# Altium PCB MCH_CLKB_PCB.PcbDoc (part 5 of 5)
Units mil, origin at the board's own origin, x right, y up, seen from the top; angles counter-clockwise.
Board outline 7110.67 x 2894.12 mil, 6 copper layers (Top Layer, GND, MidLayer1, MidLayer2, InternalPlane1, Bottom Layer), stack 61.549 mil thick; 421 components, 433 nets, 2112 pads, 1311 vias.
Unrouted connection lines stored in the file: 39.
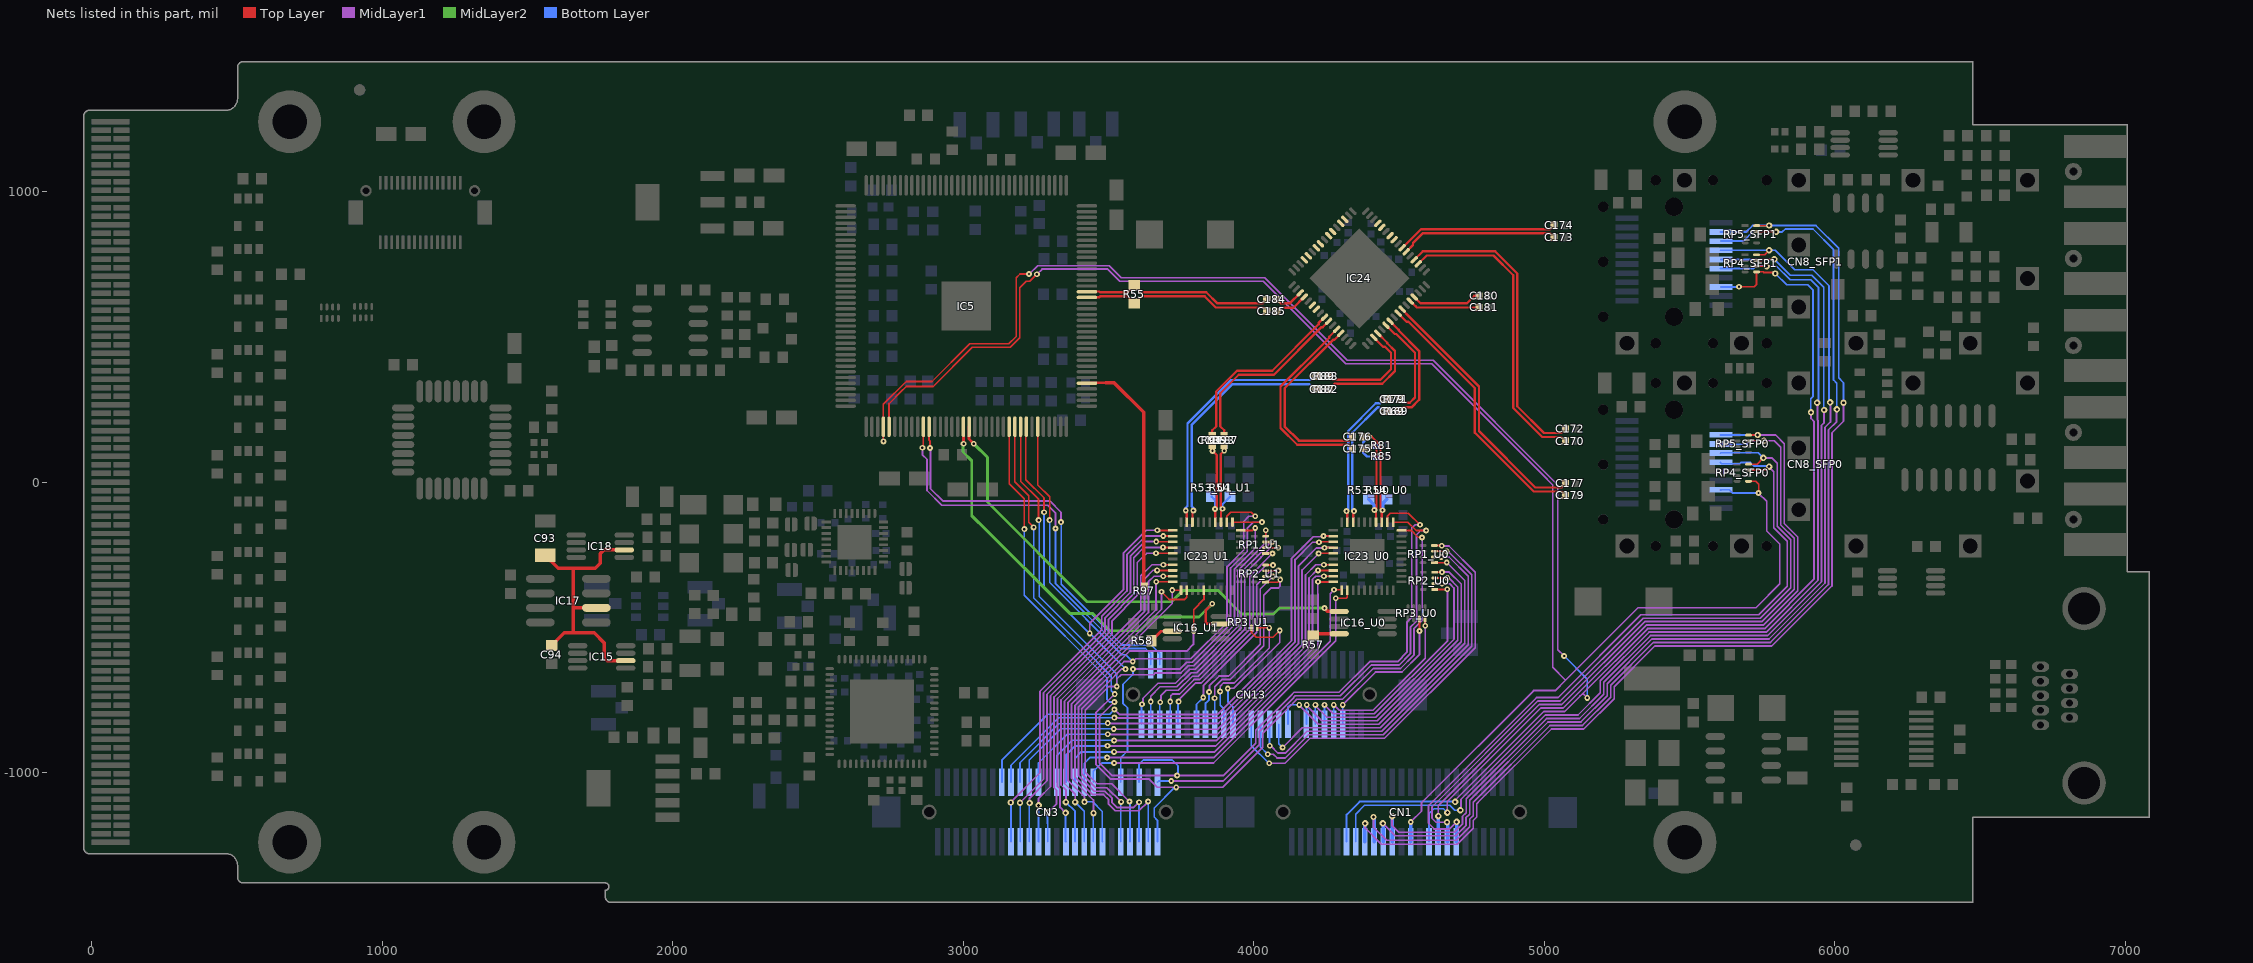
[diagram p9: the nets of this part, all layers, seen from the top]

## Via types
v1: diameter 20, hole 8, Top Layer to Bottom Layer, tented both sides, 842 vias
v2: diameter 22, hole 10, Top Layer to Bottom Layer, tented both sides, 199 vias
v3: diameter 24, hole 12, Top Layer to Bottom Layer, tented both sides, 163 vias
v4: diameter 25.98, hole 12.99, Top Layer to Bottom Layer, tented both sides, 58 vias
v5: diameter 20, hole 10, Top Layer to Bottom Layer, tented both sides, 18 vias
v6: diameter 20, hole 10, Top Layer to Bottom Layer, 16 vias
v7: diameter 28, hole 10, Top Layer to Bottom Layer, tented both sides, 15 vias

## Nets (pads, with @x,y where several pads share a name; then routed paths per layer and width w, separated by ;. In a path a pad name is that pad's centre, name@x,y a point inside that pad or via, vN(x,y) a via of type N, cw(c..) or ccw(c..) an arc to the next point about the centre after c; other vN are vias at no path point) (continued)
UP0_LOS: CN1.28 CN8_SFP0.8 IC5.77 RP4_SFP0.5 | length 5999.2
  Top Layer w6: 2744.5,251 2744.5,256 ; IC5.77@2744.75,190.65 2744.5,190.9 2744.5,256 ; IC5.77@2744.75,191.65 2744.75,236.75 ; 2780.5,306 2785,310.5 ; v1(3253.5,715) 3229.5,691 3216.5,691 3194.5,669 3194.5,496.19 3162.31,464 3031.5,464 2896.5,329 2803.5,329 2785,310.5 ; RP4_SFP0.5@5703.19,2.47 5728.03,2.47 5738.5,-8 5738.5,-37 v1(5737.5,-38) ; 2744.5,256 2744.5,270 2785,310.5
  MidLayer1 w6: v1(3253.5,715) 3271.5,733 3497.53,733 3539.53,691 4033.5,691 4317.5,407 4612.5,407 4991.5,28 ; v1(4540.5,-1170) 4577.58,-1132.92 4577.58,-1103.78 4963.42,-717.94 5037.56,-717.94 5073.5,-682 ; 4982.5,37 4991.5,28 ; v1(5737.5,-38) 5766.26,-66.76 5766.26,-168.73 5811,-213.47 5811,-350.5 5729,-432.5 5323,-432.5 5073.5,-682 ; 4991.5,28 5029.5,-10 5029.5,-638 5073.5,-682
  Bottom Layer w6: CN8_SFP0.8@5606.92,-27.22 CN8_SFP0.8@5608.48,-27.22 ; CN8_SFP0.8@5638.93,-26.32 CN8_SFP0.8@5608.48,-26.32 5636.82,-26.32 5648.5,-38 v1(5737.5,-38)
  Bottom Layer w12: CN1.28@4540.22,-1238.58 4540.22,-1170.28 v1(4540.5,-1170)
UP0_PRBSEN: CN3.49 IC23_U0.31 | length 1663.1
  Top Layer w6: IC23_U0.31@4479.94,-138.02 4530.49,-138.02 4559.47,-167 v1(4593.5,-167)
  MidLayer1 w6: v1(3716.5,-1029) 3895.31,-1029 4019.5,-904.81 4019.5,-860.03 4132.4,-747.13 4132.53,-747.13 4143.66,-736 4298.5,-736 4404.5,-630 4500.47,-630 4539.5,-590.97 4539.5,-500.16 4560.5,-479.16 4560.5,-182 4575.5,-167 v1(4593.5,-167)
  Bottom Layer w6: CN3.49@3668.56,-1033.86 3673.42,-1029 v1(3716.5,-1029)
UP0_RBCLK_FPGA: IC5.91 IC16_U0.5 | length 1700.2
  Top Layer w10: IC5.91@3020.34,190.65 3020.34,148.16 v1(3036.5,132)
  Top Layer w12: v1(4243.5,-434) 4255.11,-445.61 IC16_U0.5@4293.82,-445.61
  MidLayer2 w10: v1(3036.5,132) 3083.5,85 3083.5,-69 3426.5,-412 3717.5,-412 3755.5,-374 3878.5,-374 3958.5,-454 4068.5,-454 4088.5,-434 v1(4243.5,-434)
UP0_RBCLK_MAIN: IC16_U0.8 R57.2 | length 91.9
  Top Layer w12: R57.2@4204.5,-528.5 4210.62,-522.39 IC16_U0.8@4293.82,-522.39
UP0_RD0: CN13.26 RP1_U0.4 | length 1490
  Top Layer w6: RP1_U0.4@4622.19,-218.47 v1@4646.97,-218.47
  MidLayer1 w6: v1(4053.5,-968) 4102.5,-968 ; 4082.5,-968 4102.5,-968 ; v1@4648.5,-220 4672.37,-220 4762.5,-310.13 4762.5,-569.92 4450.42,-882 4193.63,-882 4107.63,-968 4102.5,-968
  Bottom Layer w6: CN13.26@3991.79,-833.86 3991.79,-907.16 4052.63,-968 v1(4053.5,-968)
  other v1: 4647.5,-219
UP0_RD1: CN13.28 RP1_U0.3 | length 1388.2
  Top Layer w6: RP1_U0.3@4622.19,-238.16 4663.66,-238.16 v1(4664.5,-239)
  MidLayer1 w6: v1(4048.5,-937) 4067.5,-937 4080.5,-950 4108.66,-950 4188.66,-870 4445.45,-870 4750.5,-564.95 4750.5,-319.16 4670.34,-239 v1(4664.5,-239)
  Bottom Layer w6: CN13.28@4023.29,-833.86 4023.29,-912 4048.29,-937 v1(4048.5,-937)
UP0_RD2: CN13.30 RP1_U0.2 | length 1305.9
  Top Layer w6: RP1_U0.2@4622.19,-257.84 4645.34,-257.84 v1(4645.5,-258)
  MidLayer1 w6: v1(4055.5,-908) v1@4058.5,-908 ; v1@4061.5,-908 v1@4058.5,-908 ; v1(4645.5,-258) 4672.37,-258 4738.5,-324.13 4738.5,-559.98 4440.48,-858 4183.69,-858 4108.69,-933 4083.5,-933 v1@4058.5,-908
  Bottom Layer w6: v1@4054.78,-909.28 CN13.30@4054.78,-833.86
UP0_RD3: CN13.32 RP1_U0.1 | length 1207.5
  Top Layer w6: RP1_U0.1@4622.19,-277.53 4663.97,-277.53 v1(4664.5,-277)
  MidLayer1 w6: v1(4099.5,-914) 4167.5,-846 4224.5,-846 4435.51,-846 4726.5,-555.01 4726.5,-339 v1(4664.5,-277)
  Bottom Layer w6: CN13.32@4086.28,-833.86 4086.28,-900.78 v1(4099.5,-914)
UP0_RD4: CN13.34 RP2_U0.4 | length 1111.8
  Top Layer w6: RP2_U0.4@4623.19,-310.47 4648.03,-310.47 v1(4648.5,-310)
  MidLayer1 w6: v1(4156.5,-767) 4156.5,-767.87 4222.63,-834 4430.54,-834 4714.5,-550.04 4714.5,-351.13 4673.37,-310 v1(4648.5,-310)
  Bottom Layer w6: CN13.34@4117.78,-833.86 4117.78,-775.72 4126.5,-767 v1(4156.5,-767)
UP0_RD5: CN13.38 RP2_U0.3 | length 1064.9
  Top Layer w6: RP2_U0.3@4623.19,-330.16 4664.66,-330.16 4665.5,-331 v1(4666.5,-330)
  MidLayer1 w6: v1@4181.5,-769 4234.5,-822 4425.57,-822 4702.5,-545.07 4702.5,-361.16 4671.34,-330 v1(4666.5,-330)
  Bottom Layer w6: v1@4180.77,-769.73 CN13.38@4180.77,-833.86 4181.5,-833.13 v1@4181.5,-769 ; v1@4180.77,-760.73 v1@4181.5,-760
  other v1: 4182.5,-767
UP0_RD6: CN13.40 RP2_U0.2 | length 917.3
  Top Layer w6: RP2_U0.2@4623.19,-349.84 4648.34,-349.84 v1(4648.5,-350)
  MidLayer1 w6: v1@4212.26,-770.24 4251.03,-809 4252.03,-810 4269.53,-810 4420.6,-810 4689.5,-541.1 4689.5,-365.13 4674.37,-350 v1(4648.5,-350)
  Bottom Layer w6: CN13.40@4212.26,-833.86 v1@4212.26,-770.24
  other v1: 4212.26,-767
UP0_RD7: CN13.42 RP2_U0.1 | length 838.6
  Top Layer w6: RP2_U0.1@4623.19,-369.53 4665.97,-369.53 v1(4666.5,-369)
  MidLayer1 w6: v1(4243.5,-767) 4274.5,-798 4311.5,-798 4415.63,-798 4667.5,-546.13 4667.5,-374 4672.5,-369 v1(4666.5,-369)
  Bottom Layer w6: v1@4242.5,-760 v1@4243.76,-761.26 ; v1@4243.5,-760 v1@4243.76,-760.26 ; CN13.42@4243.76,-833.86 v1@4243.76,-771.26 ; v1@4243.76,-764 v1@4243.76,-760
UP0_RD8: CN13.44 RP3_U0.4 | length 599.1
  Top Layer w6: RP3_U0.4@4590.03,-471.68 4590.03,-494.53 v1(4590.5,-495)
  MidLayer1 w6: v1(4275.26,-767) 4294.26,-786 4304.5,-786 4410.66,-786 4590.5,-606.16 4590.5,-515 v1(4590.5,-495)
  Bottom Layer w6: CN13.44@4275.26,-833.86 v1@4275.26,-769 ; v1@4275.26,-761 4275.26,-760 v1@4275.26,-761
UP0_RD9: CN13.46 RP3_U0.3 | length 517.6
  Top Layer w6: RP3_U0.3@4570.34,-471.68 4570.34,-512.84 v1(4570.5,-513)
  MidLayer1 w6: v1(4306.5,-767) 4419.5,-654 4510.41,-654 4570.5,-593.91 v1(4570.5,-513)
  Bottom Layer w6: CN13.46@4306.75,-833.86 v1@4306.75,-774.25
UP0_RX_N: C176.1 IC23_U0.33 R54_U0.2 R85.1 | length 503.9
  Top Layer w8: C176.1@4376.22,156 v1(4396.5,156) 4406.5,156 4436.5,126 4436.5,97 ; 4436.5,102 4436.5,97 ; IC23_U0.33@4440.57,-138.02 4440.57,-99.93 v1(4443.5,-97) 4436.5,-90 4436.5,97
  Bottom Layer w8: v1(4396.5,156) 4376.5,136 4376.5,102 4390.5,88 R85.1@4422.78,88
  Bottom Layer w12: v1(4443.5,-97) 4443.5,-74.5 R54_U0.2@4458.5,-59.5
UP0_RX_P: C175.1 IC23_U0.34 R53_U0.2 R81.1 | length 374.3
  Top Layer w8: v1(4396.5,115) 4410.5,129 4413.5,129 4422.5,120 4422.5,-89 v1(4415.5,-96) 4420.89,-101.39 IC23_U0.34@4420.89,-138.02
  Bottom Layer w8: v1(4396.5,115) 4407.5,126 R81.1@4422.78,126
  Bottom Layer w12: R53_U0.2@4395.5,-59.5 4415.5,-79.5 v1(4415.5,-96)
UP0_SCL: CN1.38 CN8_SFP0.5 RP4_SFP0.7 | length 2480.3
  Top Layer w6: RP4_SFP0.7@5703.19,41.84 5763.34,41.84 v2(5774.5,53)
  MidLayer1 w6: v2(4698.5,-1170) 4674.5,-1194 4620.86,-1194 4601.58,-1174.72 4601.58,-1113.72 4973.36,-741.94 5047.5,-741.94 5332.94,-456.5 5738.94,-456.5 5836.5,-358.94 5836.5,-204 5790.26,-157.76 5790.26,35.24 v2@5774.5,51 ; v2(5774.5,53) v2@5775.5,52
  Bottom Layer w6: CN8_SFP0.5@5606.92,67.27 5611.63,62.55 5671.72,62.55 5676.44,67.27 5710.23,67.27 5722.5,55 v2@5772.5,55
  Bottom Layer w12: CN1.38@4697.7,-1238.58 4699.5,-1236.78 v2@4699.5,-1170
UP0_SDA: CN1.36 CN8_SFP0.4 RP4_SFP0.8 | length 2431.1
  Top Layer w6: RP4_SFP0.8@5703.19,61.53 5733.03,61.53 v2(5754.5,83)
  MidLayer1 w6: v2(4665.5,-1171) 4627.67,-1171 4613.58,-1156.92 4613.58,-1118.69 4978.33,-753.94 5055.56,-753.94 5341,-468.5 5743.91,-468.5 5848.5,-363.91 5848.5,-199 5802.26,-152.76 5802.26,64.24 5783.5,83 v2(5754.5,83)
  Bottom Layer w6: CN8_SFP0.4@5606.92,98.76 5608.7,100.55 5736.95,100.55 v2(5754.5,83)
  Bottom Layer w12: v2(4665.5,-1171) 4667.5,-1173 4667.5,-1237.28 CN1.36@4666.2,-1238.58
UP0_SYNC: CN3.50 IC5.99 IC23_U0.30 | length 3400.5
  Top Layer w6: IC5.99@3177.82,191.65 3177.5,191.32 3177.5,1 3225.5,-47 3225.5,-139 v1(3242.5,-156) ; IC23_U0.30@4508.48,-166.56 4542.06,-166.56 4565.5,-190 v1@4579.5,-190
  MidLayer1 w6: v1@3520.63,-730 3457.5,-793.13 3457.5,-973 3506.5,-1022 3638.5,-1022 3667.5,-1051 v1(3733.5,-1051) 3893.5,-1051 4031.5,-913 4031.5,-865 4137.37,-759.13 ; 4137.5,-759.13 4148.63,-748 4305.5,-748 4411.5,-642 4505.44,-642 4551.5,-595.94 4551.5,-505.13 4580.5,-476.13 v1@4580.5,-191
  Bottom Layer w6: v1(3242.5,-156) 3242.5,-371 3242.5,-399 3409.5,-566 3409.5,-568 3509.5,-668 3509.5,-718 v1(3521.5,-730) ; CN3.50@3668.56,-1238.58 3668.56,-1164.06 3657.5,-1153 3657.5,-1122 3728.5,-1051 v1(3733.5,-1051)
  other v1: 4579.5,-191
UP0_SYNCEN: CN3.45 IC5.98 IC23_U0.32 | length 3494.1
  Top Layer w6: IC5.98@3158.14,191.65 IC5.98@3158.5,191.28 ; IC5.98@3158.5,190.65 3158.5,-6 3210.5,-58 v1(3210.5,-162) ; IC23_U0.32@4460.26,-138.02 4460.26,-117.24 4470.5,-107 4532.5,-107 v1(4572.5,-147)
  MidLayer1 w6: v1(3520.5,-757) 3519.63,-757 3469.5,-807.13 3469.5,-968.03 3511.47,-1010 3670.5,-1010 ; 3661.5,-1010 3670.5,-1010 ; v1(4572.5,-147) 4555.5,-147 4544.5,-158 4544.5,-466 4527.5,-483 4527.5,-586 4495.5,-618 4399.53,-618 4293.53,-724 4138.69,-724 4127.56,-735.13 4127.43,-735.13 4007.5,-855.06 4007.5,-899.84 3897.34,-1010 v1(3736.5,-1010) 3670.5,-1010
  Bottom Layer w6: v1(3210.5,-162) 3210.5,-390.23 3494.89,-674.62 3494.89,-682 3494.89,-749.39 3502.5,-757 v1(3520.5,-757) ; CN3.45@3605.57,-1033.86 3605.57,-970.93 3619.5,-957 3719.5,-957 3739.5,-977 3739.5,-1007 v1(3736.5,-1010)
UP0_TD0: CN3.15 IC23_U0.2 | length 1744.1
  Top Layer w6: v1(4240.5,-186) 4273.99,-186 IC23_U0.2@4274.23,-186.24
  MidLayer1 w6: v1(3520.5,-783) 3537.5,-800 3564.5,-800 ; 3544,-800 3564.5,-800 ; v1(4240.5,-186) 4238.5,-188 4204.53,-188 4130.5,-262.03 4130.5,-545.38 3875.88,-800 3564.5,-800
  Bottom Layer w6: CN3.15@3133.13,-1033.86 3133.13,-957.37 3277,-813.5 ; 3281.5,-809 3277,-813.5 ; v1(3520.5,-783) 3504.5,-799 3460.5,-799 3291.5,-799 3277,-813.5
UP0_TD1: CN3.17 IC23_U0.3 | length 1658.9
  Top Layer w6: v1(4224.5,-207) 4225.57,-205.93 IC23_U0.3@4274.23,-205.93
  MidLayer1 w6: v1(3520.5,-811) 3521.5,-812 3880.85,-812 4142.5,-550.35 4142.5,-267 4202.5,-207 v1(4224.5,-207)
  Bottom Layer w6: CN3.17@3164.63,-1033.86 3164.63,-974.87 3305,-834.5 ; 3308.5,-831 3305,-834.5 ; v1(3520.5,-811) 3328.5,-811 3305,-834.5
UP0_TD2: CN3.19 IC23_U0.4 | length 1628.2
  Top Layer w6: v1(4243.5,-226) 4243.89,-225.61 IC23_U0.4@4274.23,-225.61
  MidLayer1 w6: v1(3497.5,-830) 3498.5,-831 3559.5,-831 ; 3539.31,-831 3559.5,-831 ; v1(4243.5,-226) 4242.5,-227 4215.63,-227 4154.5,-288.13 4154.5,-555.32 3878.82,-831 3559.5,-831
  Bottom Layer w6: CN3.19@3196.12,-1033.86 3195.5,-1033.24 3195.5,-966 3329.5,-832 v1@3495.5,-832
UP0_TD3: CN3.21 IC23_U0.5 | length 1596.5
  Top Layer w6: v1(4223.5,-246) 4224.2,-245.3 IC23_U0.5@4274.23,-245.3
  MidLayer1 w6: v1(3518.5,-850) 3519.5,-851 3561.5,-851 ; 3534.34,-851 3561.5,-851 ; v1(4223.5,-246) 4166.5,-303 4166.5,-560.3 3875.8,-851 3561.5,-851
  Bottom Layer w6: CN3.21@3227.62,-1033.86 3227.62,-956.88 3335.5,-849 v1@3517.5,-849
UP0_TD4: CN3.23 IC23_U0.7 | length 1508.3
  Top Layer w6: v1@4241.83,-284.67 IC23_U0.7@4274.23,-284.67
  MidLayer1 w6: v1(3497.5,-868) 3498.5,-869 3874.77,-869 4178.5,-565.27 4178.5,-320.13 4213.63,-285 v1(4241.5,-285)
  Bottom Layer w6: CN3.23@3259.11,-1033.86 3259.11,-995.54 3259.11,-967.39 3358.5,-868 v1(3497.5,-868)
UP0_TD5: CN3.27 IC23_U0.8 | length 1476.9
  Top Layer w6: v1(4221.5,-304) 4221.85,-304.35 IC23_U0.8@4274.23,-304.35
  MidLayer1 w6: v1@3518.5,-890 v1(3519.5,-890) 3870.74,-890 4097.61,-663.13 4097.74,-663.13 4190.5,-570.37 4190.5,-330.16 4216.66,-304 v1(4221.5,-304)
  Bottom Layer w6: CN3.27@3322.11,-1033.86 3322.11,-974 ; 3322.11,-947.85 3322.11,-974 ; v1(3519.5,-890) 3518.5,-889 3375.5,-889 3322.11,-942.39 3322.11,-974
UP0_TD6: CN3.29 IC23_U0.9 | length 1425.6
  Top Layer w6: v1(4241.5,-324) v1(4241.5,-324) IC23_U0.9@4274.23,-324.04
  MidLayer1 w6: v1(3496.5,-908) 3497.5,-909 3868.71,-909 4102.58,-675.13 4102.71,-675.13 4202.5,-575.34 4202.5,-335.13 4213.63,-324 v1(4241.5,-324)
  Bottom Layer w6: CN3.29@3353.6,-1033.86 3353.6,-972 ; 3353.6,-966.68 3353.6,-972 ; 3425.5,-909 3416.5,-909 ; v1(3496.5,-908) 3495.5,-909 3416.5,-909 ; 3353.6,-972 3353.6,-939.9 3384.5,-909 3416.5,-909
UP0_TD7: CN3.31 IC23_U0.10 | length 1360.2
  Top Layer w6: v1(4221.5,-343) 4222.22,-343.72 IC23_U0.10@4274.23,-343.72
  MidLayer1 w6: v1(3519.5,-929) 3861.68,-929 3865.68,-929 4107.55,-687.13 4107.68,-687.13 4221.5,-573.31 4221.5,-384.87 4220.5,-383.87 4220.5,-344 v1(4221.5,-343)
  Bottom Layer w6: CN3.31@3385.1,-1033.86 3385.1,-950.4 3406.5,-929 3512.5,-929 v1(3519.5,-929)
UP0_TD8: CN3.33 IC23_U0.11 | length 1298.6
  Top Layer w6: v1(4276.5,-371) 4301.51,-371 IC23_U0.11@4302.78,-372.27
  MidLayer1 w6: v1@3492.5,-948 v1(3495.5,-948) 3863.65,-948 4112.52,-699.13 4112.65,-699.13 4263.5,-548.28 4263.5,-402 4263.5,-384 v1(4276.5,-371)
  Bottom Layer w6: CN3.33@3416.59,-1033.86 3416.59,-968.91 3437.5,-948 v1(3495.5,-948)
UP0_TD9: CN3.35 IC23_U0.12 | length 1270.5
  Top Layer w6: v1(4282.5,-400) 4318.5,-400 4322.46,-396.04 IC23_U0.12@4322.46,-372.27
  MidLayer1 w6: v1(3519.5,-967) 3861.62,-967 4117.49,-711.13 4117.62,-711.13 4282.5,-546.25 v1(4282.5,-400)
  Bottom Layer w6: CN3.35@3448.09,-1033.86 3448.09,-995.54 3466.02,-977.61 3476.63,-967 v1(3519.5,-967)
UP0_TX_DISABLE: CN1.34 CN8_SFP0.3 RP5_SFP0.7 | length 2441.6
  Top Layer w6: RP5_SFP0.7@5703.19,141.84 5756.34,141.84 v2(5756.5,142)
  MidLayer1 w6: v2(4635.5,-1150) 4635.5,-1113.75 4983.3,-765.94 5060.53,-765.94 5345.97,-480.5 5748.88,-480.5 5860.5,-368.88 5860.5,-193.97 5814.26,-147.73 5814.26,120.24 5792.5,142 v2(5756.5,142)
  Bottom Layer w6: CN8_SFP0.3@5606.92,130.26 5695.76,130.26 5707.5,142 v2(5756.5,142)
  Bottom Layer w12: CN1.34@4634.7,-1238.58 4635.5,-1237.79 v2(4635.5,-1150)
UP0_TX_FAULT: CN1.32 CN8_SFP0.2 RP5_SFP0.8 | length 2519
  Top Layer w6: RP5_SFP0.8@5703.19,161.53 5726.03,161.53 v2@5731.5,167
  MidLayer1 w6: v2(4666.5,-1138) 4666.5,-1099.72 4988.27,-777.94 5065.5,-777.94 5350.94,-492.5 5753.85,-492.5 5872.5,-373.85 5872.5,-189 5826.26,-142.76 5826.26,132.24 5796.5,162 5742.5,162 v2@5734.5,170 ; v2@5726.03,161.53 v2@5731.5,167
  Bottom Layer w6: CN1.32@4603.21,-1238.58 4603.21,-1142.29 4620.5,-1125 4653.5,-1125 v2(4666.5,-1138) ; CN8_SFP0.2@5606.92,161.76 5726.26,161.76 5731.5,167 v2@5734.5,170
  other v2: 5734.5,162
UP0_TX_N: C171.1 IC23_U0.39 R79.1 | length 505.7
  Top Layer w8: v1(4319.3,-100) 4322.46,-103.16 IC23_U0.39@4322.46,-138.02
  Bottom Layer w8: v1(4319.3,-100) 4325.3,-94 4325.3,175.8 4420.5,271 4435.5,271 4445.5,281 v1(4445.5,285) R79.1@4465.77,285
UP0_TX_P: C169.1 IC23_U0.38 R69.1 | length 480
  Top Layer w8: IC23_U0.38@4342.15,-138.02 4342.15,-103.16 v1(4345.3,-100)
  Bottom Layer w8: v1(4345.3,-100) 4339.3,-94 4339.3,169.8 4426.5,257 4431.5,257 v1(4445.5,243) R69.1@4465.77,243
UP0_TXCLK_FPGA: IC5.113 R97.1 | length 837.6
  Top Layer w8: IC5.113@3425.85,341.25 3491.25,341.25 3491.5,341
  Top Layer w12: 3491.5,341 3520.5,341 3621.5,240 R97.1@3621.5,-360
UP1_DETECT: CN1.16 CN8_SFP1.6 RP4_SFP1.6 | length 3504
  Top Layer w6: RP4_SFP1.6@5734.19,743.16 v2@5765.34,743.16
  MidLayer1 w6: v2(4711.5,-1130) 4713.56,-1127.94 4713.56,-1091.7 5003.32,-801.94 5116.56,-801.94 5192.94,-725.56 5192.94,-684.44 5360.88,-516.5 5763.79,-516.5 5942.5,-337.79 5942.5,211.97 5940.5,213.97 v2@5940.5,272
  Bottom Layer w6: CN1.16@4351.24,-1238.58 4351.24,-1143.26 4381.5,-1113 4674.5,-1113 4691.5,-1130 v2(4711.5,-1130) ; CN8_SFP1.6@5606.92,734.99 5721.49,734.99 5724,737.5 ; 5729.5,743 5724,737.5 ; v2(5765.5,743) 5799.53,743 5846.53,696 5917.5,696 5944.5,669 5944.5,278 v2(5939.5,273) v2@5938.5,274 ; v2@5768.5,745 5731.5,745 5724,737.5
UP1_ENABLE: CN3.42 IC5.101 IC23_U1.1 | length 2267
  Top Layer w6: 3215.5,147.21 3215.5,141 ; IC5.101@3217.19,191.65 3215.5,189.95 3215.5,141 ; v1(3278.5,-104) 3278.5,-55 3215.5,8 3215.5,141 ; v1@3669.06,-166.56 IC23_U1.1@3721.23,-166.56
  MidLayer1 w6: v1@3434.5,-522 v1(3435.5,-521) 3435.5,-486.25 3551.5,-370.25 3551.5,-245.09 3630.59,-166 v1(3668.5,-166) ; 3503.53,-685 3496.51,-692.01 ; v1(3543.5,-1101) 3494.5,-1052 3456.5,-1052 3408.5,-1004 3408.5,-780.03 3496.51,-692.01 ; v1(3558.5,-644) 3544.53,-644 3496.51,-692.01
  Bottom Layer w6: v1(3278.5,-104) 3278.5,-365 3284.5,-371 3434.5,-521 3435,-520.5 v1@3435.5,-520 ; v1(3435.5,-521) v1@3435.5,-520 ; CN3.42@3542.58,-1238.58 v1@3542.58,-1101.92 ; v1(3558.5,-644) 3558.5,-643 3436,-520.5 v1@3435.5,-520
UP1_LOOPEN: CN3.48 IC23_U1.15 | length 1402.4
  Top Layer w6: v1@3792.5,-512 3792.5,-510 3793.5,-509 3793.5,-439 3828.52,-403.98 IC23_U1.15@3828.52,-372.27
  MidLayer1 w6: v1(3636.5,-1100) 3604.5,-1132 3523.37,-1132 3500.5,-1109.13 3500.5,-1093.72 3482.78,-1076 3446.56,-1076 3384.5,-1013.94 3384.5,-770.09 3572.59,-582 3769.5,-582 3792.5,-559 3792.5,-514 v1(3793.5,-513)
  Bottom Layer w6: v1(3636.5,-1100) 3637.07,-1100.57 CN3.48@3637.07,-1238.58
UP1_LOS: CN1.14 CN8_SFP1.8 IC5.76 RP4_SFP1.5 | length 7316.7
  Top Layer w6: IC5.76@2725.07,191.65 IC5.76@2725.07,190.65 ; v1(2725.5,140) 2725.07,140.43 IC5.76@2725.07,190.65 ; v1(3226.5,716) 3195.5,716 3182.5,703 3182.5,501.16 3157.34,476 3022.5,476 2892.5,346 2803.53,346 2725.07,267.54 IC5.76@2725.07,190.65 ; v1(5670.5,672) 5722.5,672 5731.19,680.69 RP4_SFP1.5@5731.19,723.47 ; RP4_SFP1.5@5734.19,723.47 5753.91,723.47 5756.39,721 5792.5,721 v2(5795.5,718)
  MidLayer1 w6: v1(3226.5,716) 3227.63,716 3256.63,745 3502.5,745 3544.5,703 4038.5,703 4322.5,419 4617.47,419 5046.5,-10.03 5046.5,-577 v1(5068.5,-599) ; v2@4693.5,-1101 v2(4693.56,-1100.94) 4693.56,-1094.73 4998.35,-789.94 5070.47,-789.94 5119.96,-740.46 ; 5124.41,-736 5119.96,-740.46 ; v1(5148.5,-743) 5135.96,-730.46 5129.96,-730.46 ; v2(5918.5,240) 5918.5,219 5928.5,209 5928.5,-334.82 5758.82,-504.5 5355.91,-504.5 5129.96,-730.46 ; 5119.96,-740.46 5129.96,-730.46
  Bottom Layer w6: CN1.14@4319.74,-1238.58 4319.74,-1144.76 4364.5,-1100 v2@4693.56,-1100 ; v1(5068.5,-599) 5148.5,-679 v1(5148.5,-743) ; CN8_SFP1.8@5608.48,671.68 5670.18,671.68 v1(5670.5,672) ; v2(5795.5,718) 5834.5,679 5906.76,679 5925.76,660 5925.76,296.32 5926.29,295.79 5917.5,287 5917.5,241 v2(5918.5,240)
UP1_PRBSEN: CN3.41 IC23_U1.31 | length 1339.7
  Top Layer w6: IC23_U1.31@3926.94,-138.02 v1(4028.5,-138)
  MidLayer1 w6: v1@3585.5,-642 3583.5,-644 v1(3584.5,-644) 3745.71,-644 3769.59,-620.12 3788.72,-620.12 3920.5,-488.34 3920.5,-295.97 3977.5,-238.97 3977.5,-159.13 3998.63,-138 v1(4028.5,-138)
  Bottom Layer w6: CN3.41@3542.58,-1033.86 3542.58,-948.92 3565.5,-926 3565.5,-777.38 3549.72,-761.6 3549.72,-696.91 3584.5,-662.13 v1(3584.5,-644) v1@3583.5,-644
UP1_RBCLK_FPGA: IC5.90 IC16_U1.3 | length 1486.4
  Top Layer w8: v1(3857.5,-419) 3834.5,-442 3834.5,-482 3840.7,-488.2 IC16_U1.3@3885.18,-488.2
  Top Layer w10: v1@3000.66,132.84 IC5.90@3000.66,190.65
  MidLayer2 w10: v1(3001.5,132) 2999.5,130 2999.5,103 3029.5,73 3029.5,18 ; 3029.5,29 3029.5,18 ; v1(3857.5,-419) 3811.5,-465 3655.5,-465 3608.5,-512 3505.5,-512 3445.5,-452 3366.5,-452 3054.5,-140 3053.5,-140 3029.5,-116 3029.5,18
UP1_RBCLK_MAIN: IC16_U1.7 R58.2 | length 85.6
  Top Layer w10: R58.2@3648,-547 3681.2,-513.8 IC16_U1.7@3719.82,-513.8
UP1_RD0: CN13.2 RP1_U1.4 | length 911.6
  Top Layer w6: RP1_U1.4@4041.19,-186.47 v1@4041.19,-166.32
  MidLayer1 w6: v1(3615.5,-765) 3618.9,-761.6 3618.9,-744.6 3670.47,-693.03 3720.96,-693.03 3730.62,-693.03 3779.53,-644.12 3798.66,-644.12 3945.5,-497.28 3945.5,-304.91 4001.5,-248.91 4001.5,-248.19 4041.5,-208.19 v1(4041.5,-166)
  Bottom Layer w6: CN13.2@3613.84,-833.86 3613.84,-766.66 v1(3615.5,-765)
UP1_RD1: CN13.4 RP1_U1.3 | length 872.6
  Top Layer w6: RP1_U1.3@4041.19,-206.16 4062.34,-206.16 v1(4062.5,-206)
  MidLayer1 w6: v1(3645.5,-756) 3645.5,-737 3677.47,-705.03 3735.59,-705.03 3784.5,-656.12 3803.63,-656.12 3957.5,-502.25 3957.5,-309.88 4013.5,-253.88 4013.5,-253.16 4060.66,-206 v1(4062.5,-206)
  Bottom Layer w6: CN13.4@3645.33,-833.86 3645.33,-756.17 v1(3645.5,-756) v1@3648.5,-753
UP1_RD2: CN13.6 RP1_U1.2 | length 874.1
  Top Layer w6: RP1_U1.2@4041.19,-225.84 4084.34,-225.84 v1(4084.5,-226)
  MidLayer1 w6: v1@3683.5,-756 3680.5,-756 3680.5,-736 3699.47,-717.03 3740.56,-717.03 3789.47,-668.12 3808.6,-668.12 3969.5,-507.22 3969.5,-314.85 4025.5,-258.85 4025.5,-258.13 4056.63,-227 4083.5,-227 v1(4084.5,-226)
  Bottom Layer w6: CN13.6@3676.83,-833.86 3676.83,-759.67 v1(3678.5,-758) v1@3680.5,-756
UP1_RD3: CN13.8 RP1_U1.1 | length 786.3
  Top Layer w6: RP1_U1.1@4041.19,-245.53 4064.03,-245.53 v1(4064.5,-246)
  MidLayer1 w6: v1@3714.63,-756 v1(3712.5,-756) 3714.5,-754 3714.5,-736 3720.8,-729.7 3744.86,-729.7 3794.44,-680.12 3813.57,-680.12 3986.5,-507.19 3986.5,-324 v1(4064.5,-246)
  Bottom Layer w6: CN13.8@3708.33,-833.86 3708.33,-804.17 3712.5,-800 v1(3712.5,-756)
UP1_RD4: CN13.10 RP2_U1.4 | length 736.4
  Top Layer w6: RP2_U1.4@4041.19,-285.47 v1@4065.97,-285.47
  MidLayer1 w6: v1@3744.63,-756 v1(3741.5,-756) 3741.5,-750.03 3799.41,-692.12 3818.54,-692.12 3998.5,-512.16 3998.5,-330 4042.5,-286 v1(4066.5,-286)
  Bottom Layer w6: CN13.10@3739.82,-833.86 3739.82,-757.68 v1(3741.5,-756)
UP1_RD5: CN13.14 RP2_U1.3 | length 706.1
  Top Layer w6: RP2_U1.3@4041.19,-305.16 4085.34,-305.16 v1(4085.5,-305)
  MidLayer1 w6: v1(3826.5,-742) 3827.5,-741 3827.5,-700.13 4010.5,-517.13 4010.5,-353.13 4057.63,-306 4084.5,-306 v1(4085.5,-305)
  Bottom Layer w6: CN13.14@3802.81,-833.86 3802.81,-765.69 v1(3826.5,-742)
UP1_RD6: CN13.16 RP2_U1.2 | length 648.3
  Top Layer w6: RP2_U1.2@4041.19,-324.84 4065.34,-324.84 v1(4065.5,-325)
  MidLayer1 w6: v1(3846.5,-723) 3847.5,-722 3847.5,-701 3880.5,-668 3913.37,-668 4022.5,-558.87 4022.5,-368 v1(4065.5,-325)
  Bottom Layer w6: CN13.16@3834.31,-833.86 3834.31,-761.06 3846.5,-748.87 v1(3846.5,-723)
UP1_RD7: CN13.18 RP2_U1.1 | length 676.9
  Top Layer w6: RP2_U1.1@4041.19,-344.53 4072.84,-344.53 4082.97,-344.53 v1(4091.5,-336)
  MidLayer1 w6: v1(3865.5,-744) 3865.5,-705.03 3890.53,-680 3918.34,-680 4034.5,-563.84 4034.5,-389.13 4058.63,-365 4084.5,-365 4090.5,-359 4090.5,-337 v1(4091.5,-336)
  Bottom Layer w6: v1(3865.5,-744) 3865.81,-744.31 CN13.18@3865.81,-833.86
UP1_RD8: CN13.20 RP3_U1.4 | length 478.7
  Top Layer w6: RP3_U1.4@4012.03,-501.68 4053.19,-501.68 v1(4053.5,-502)
  MidLayer1 w6: v1(3884.5,-721) 3884.5,-703 3895.5,-692 3925.5,-692 ; 3917.5,-692 3925.5,-692 ; v1(4053.5,-502) 4053.5,-571.47 3932.97,-692 3925.5,-692
  Bottom Layer w6: v1(3884.5,-721) 3884.5,-768 3897.3,-780.8 CN13.20@3897.3,-833.86
UP1_RD9: CN13.22 RP3_U1.3 | length 545.8
  Top Layer w6: RP3_U1.3@3992.34,-501.68 3992.34,-517.84 4008.5,-534 4066.5,-534 v1(4089.5,-511)
  MidLayer1 w6: v1@3911,-711.5 3912.5,-710 3931.94,-710 4089.5,-552.44 v1(4089.5,-511)
  Bottom Layer w6: v1(3910.5,-711) 3911.5,-712 3911.5,-757 3928.8,-774.3 CN13.22@3928.8,-833.86
UP1_RX_N: C187.1 IC23_U1.33 R54_U1.2 R93.1 | length 328.1
  Top Layer w8: IC23_U1.33@3887.57,-138.02 3887.57,-91.93 3887.64,-92 v1(3892.5,-92) 3886.5,-86 3886.5,96.08 v1(3898.46,108.04) C187.1@3898.46,125.37
  Bottom Layer w8: v1(3892.5,-92) 3892.5,-76.5 R54_U1.2@3918.5,-50.5
UP1_RX_P: C186.1 IC23_U1.34 R53_U1.2 R91.1 | length 320.4
  Top Layer w8: C186.1@3857.27,125.37 3858.27,124.37 v1(3858.27,107.23) 3872.5,93 3872.5,-87 v1(3866.5,-93) 3867.5,-93 3867.89,-93.39 IC23_U1.34@3867.89,-138.02
  Bottom Layer w8: R53_U1.2@3855.5,-50.5 3866.5,-61.5 v1(3866.5,-93)
UP1_SCL: CN1.24 CN8_SFP1.5 RP4_SFP1.7 | length 3502.9
  Top Layer w6: RP4_SFP1.7@5734.19,762.84 5734.34,763 5750.5,763 5754.5,767 v2(5792.5,767)
  MidLayer1 w6: v2(4476.5,-1150) 4476.5,-1183 4499.5,-1206 4690.78,-1206 4718.5,-1178.28 4718.5,-1151.28 4731.5,-1138.28 4731.5,-1090.73 5008.29,-813.94 5121.53,-813.94 5204.94,-730.53 5204.94,-689.41 5365.85,-528.5 5768.76,-528.5 5954.5,-342.76 5954.5,195 5963.5,204 v2(5963.5,248)
  Bottom Layer w6: CN8_SFP1.5@5608.48,766.49 v2@5791.99,766.49 ; v2(5792.5,767) 5847.5,712 5920.5,712 5962.5,670 v2@5962.5,249
  Bottom Layer w12: CN1.24@4477.22,-1238.58 v2@4477.22,-1150.72
UP1_SDA: CN1.22 CN8_SFP1.4 RP4_SFP1.8 | length 3536.6
  Top Layer w6: RP4_SFP1.8@5734.19,782.53 5759.03,782.53 v2(5774.5,798)
  MidLayer1 w6: v2(4444.5,-1175) 4487.5,-1218 4695.75,-1218 4730.5,-1183.25 4730.5,-1156.25 4743.5,-1143.25 4743.5,-1095.7 5013.26,-825.94 5066.5,-825.94 5126.5,-825.94 5216.94,-735.5 5216.94,-694.38 5370.82,-540.5 5773.73,-540.5 5966.5,-347.73 5966.5,188 5985.5,207 5985.5,273 v2(5984.5,274)
  Bottom Layer w6: CN8_SFP1.4@5606.92,797.98 v2(5774.5,798) 5795.6,798 5862.6,731 5925.35,731 5980.35,676 5980.35,278.15 v2(5984.5,274)
  Bottom Layer w12: v2(4444.5,-1175) 4445.73,-1176.23 CN1.22@4445.73,-1238.58
UP1_SYNC: CN3.44 IC5.100 IC23_U1.30 | length 2645.2
  Top Layer w6: IC5.100@3197.51,191.65 3198.5,190.65 3198.5,2 3259.5,-59 v1(3259.5,-131) ; IC23_U1.30@3955.48,-166.56 3996.94,-166.56 v1(4005.5,-158)
  MidLayer1 w6: v1@3529.5,-703 v1(3528.5,-704) ; v1(3572.5,-1100) 3511.5,-1039 3460.47,-1039 3420.5,-999.03 3420.5,-785 3501.5,-704 v1(3528.5,-704) ; 3989.5,-243.94 3933.5,-299.94 3933.5,-492.31 3793.69,-632.12 3774.56,-632.12 3749.68,-657 3661.5,-657 3655.5,-663 3543.5,-663 3528.5,-678 v1(3528.5,-704) ; 3989.5,-243 4005.5,-227 v1(4005.5,-158)
  Bottom Layer w6: v1(3259.5,-131) 3261.5,-133 3261.5,-371 3261.5,-394 3528.5,-661 v1(3528.5,-704) ; CN3.44@3574.07,-1238.58 v1@3574.07,-1101.57
UP1_SYNCEN: CN3.46 IC5.103 IC23_U1.32 | length 2794.3
  Top Layer w6: 3256.5,147.21 3256.5,129 ; IC5.103@3256.56,191.65 3256.5,191.58 3256.5,129 ; v1(3297.5,-131) 3297.5,-51 3256.5,-10 3256.5,129 ; IC23_U1.32@3907.26,-138.02 3907.26,-118.24 3921.5,-104 3991.5,-104 v1(4005.5,-118)
  MidLayer1 w6: v1(3605.5,-1102) 3587.5,-1120 3528.34,-1120 3512.5,-1104.16 3512.5,-1088.75 3487.75,-1064 3451.53,-1064 3396.5,-1008.97 3396.5,-775.06 3553.56,-618 v1(3583.5,-618) 3593.38,-608.12 3783.75,-608.12 3908.5,-483.37 3908.5,-291 3965.5,-234 3965.5,-136 3983.5,-118 v1(4005.5,-118)
  Bottom Layer w6: v1(3297.5,-131) 3297.5,-345.75 3546.12,-594.38 3559.88,-594.38 v1(3583.5,-618) ; CN3.46@3605.57,-1238.58 v1@3605.57,-1102.07
UP1_TD0: CN3.18 IC23_U1.2 | length 1339
  Top Layer w6: v1(3688.5,-186) 3720.99,-186 IC23_U1.2@3721.23,-186.24
  MidLayer1 w6: v2(3163.5,-1103) 3166.5,-1100 3166.5,-1099 3264.5,-1001 3264.5,-720.38 3476.5,-508.38 3476.5,-462.22 3563.5,-375.22 3563.5,-250.06 3627.56,-186 v1(3688.5,-186)
  Bottom Layer w6: v2(3163.5,-1103) 3164.63,-1104.13 CN3.18@3164.63,-1238.58
UP1_TD1: CN3.20 IC23_U1.3 | length 1307.2
  Top Layer w6: v1(3664.5,-205) 3665.43,-205.93 IC23_U1.3@3721.23,-205.93
  MidLayer1 w6: v2(3195.5,-1104) 3276.5,-1023 3276.5,-725.35 3488.5,-513.35 3488.5,-467.19 3575.5,-380.19 3575.5,-255.03 3625.53,-205 v1(3664.5,-205)
  Bottom Layer w6: CN3.20@3196.12,-1238.58 v2@3196.12,-1104.62
UP1_TD2: CN3.22 IC23_U1.4 | length 1274.9
  Top Layer w6: v1(3687.5,-225) 3720.62,-225 IC23_U1.4@3721.23,-225.61
  MidLayer1 w6: v2(3228.5,-1105) 3228.5,-1088 3288.5,-1028 3288.5,-730.32 3500.5,-518.32 3500.5,-472.16 3587.5,-385.16 3587.5,-260 3622.5,-225 v1(3687.5,-225)
  Bottom Layer w6: CN3.22@3227.62,-1238.58 v2@3227.62,-1105.88
UP1_TD3: CN3.24 IC23_U1.5 | length 1245.7
  Top Layer w6: v1(3663.5,-245) 3720.93,-245 IC23_U1.5@3721.23,-245.3
  MidLayer1 w6: v2(3259.5,-1113) 3259.5,-1089 3300.5,-1048 3300.5,-735.3 3512.5,-523.3 3512.5,-477.13 3599.5,-390.13 3599.5,-277 3631.5,-245 v1(3663.5,-245)
  Bottom Layer w6: CN3.24@3259.11,-1238.58 3259.5,-1238.2 v2(3259.5,-1113) v2@3259.5,-1105
UP1_TD4: CN3.26 IC23_U1.7 | length 1183.8
  Top Layer w6: v1@3688.5,-284 v1(3689.17,-284.67) IC23_U1.7@3721.23,-284.67
  MidLayer1 w6: v2(3290.5,-1137) 3292.5,-1137 3321.5,-1108 3321.5,-1061.73 3312.5,-1052.73 3312.5,-740.27 3611.5,-441.27 3611.5,-323 3649.83,-284.67 v1(3689.17,-284.67)
  Bottom Layer w6: v2(3290.5,-1137) 3290.5,-1176 3290.61,-1176.11 CN3.26@3290.61,-1238.58
UP1_TD5: CN3.30 IC23_U1.8 | length 1156.2
  Top Layer w6: v1(3667.5,-304) 3667.85,-304.35 IC23_U1.8@3721.23,-304.35
  MidLayer1 w6: v2@3349.5,-1138 v2@3351.5,-1138 ; v1(3667.5,-304) 3653.5,-304 3624.5,-333 3624.5,-445.24 3324.5,-745.24 3324.5,-1047.76 3333.5,-1056.76 3333.5,-1120 v2@3351.5,-1138 ; v2@3351.5,-1138 v2(3352.5,-1139) 3353.5,-1138 v2@3351.5,-1138
  Bottom Layer w6: v2(3352.5,-1139) 3352.5,-1237.48 CN3.30@3353.6,-1238.58
UP1_TD6: CN3.32 IC23_U1.9 | length 1131.9
  Top Layer w6: v1(3688.5,-324) IC23_U1.9@3721.23,-324.04 IC23_U1.9@3721.23,-324.04
  MidLayer1 w6: v2(3353.5,-1102) 3353.5,-1059.79 3336.5,-1042.79 3336.5,-750.21 3637.5,-449.21 3637.5,-343.13 3656.63,-324 v1(3688.5,-324)
  Bottom Layer w6: v2(3353.5,-1102) 3385.1,-1133.6 CN3.32@3385.1,-1238.58
UP1_TD7: CN3.34 IC23_U1.10 | length 1111.7
  Top Layer w6: v1(3664.5,-343) 3720.51,-343 IC23_U1.10@3721.23,-343.72
  MidLayer1 w6: v2(3385.5,-1102) 3385.5,-1074.82 3348.5,-1037.82 3348.5,-755.18 3663.5,-440.18 3663.5,-344 v1(3664.5,-343)
  Bottom Layer w6: v2(3385.5,-1102) 3416.59,-1133.09 CN3.34@3416.59,-1238.58
UP1_TD8: CN3.36 IC23_U1.11 | length 1068.2
  Top Layer w6: v1(3719.5,-372) 3719.77,-372.27 IC23_U1.11@3749.78,-372.27
  MidLayer1 w6: v2(3448.5,-1140) 3448.5,-1094.91 3372.5,-1018.91 3372.5,-765.12 3719.5,-418.12 v1(3719.5,-372)
  Bottom Layer w6: CN3.36@3448.09,-1238.58 v2@3448.09,-1144
UP1_TD9: CN3.38 IC23_U1.12 | length 1185.1
  Top Layer w6: v1(3682.5,-378) 3708.5,-404 3762.5,-404 3769.46,-397.04 IC23_U1.12@3769.46,-372.27
  MidLayer1 w6: v2(3417.5,-1101) 3417.5,-1083 3360.5,-1026 3360.5,-760.15 3682.5,-438.15 v1(3682.5,-378)
  Bottom Layer w6: v2(3417.5,-1101) 3445.5,-1101 3478.5,-1134 3478.5,-1237.5 CN3.38@3479.59,-1238.58
UP1_TX_DISABLE: CN1.20 CN8_SFP1.3 RP5_SFP1.7 | length 3804.1
  Top Layer w6: RP5_SFP1.7@5731.19,862.84 5796.66,862.84 v2(5798.5,861)
  MidLayer1 w6: v2(4412.5,-1153) 4412.5,-1188 4457.5,-1233 4697.73,-1233 4743.58,-1187.14 4743.58,-1160.14 4755.5,-1148.23 4755.5,-1102.43 5019.99,-837.94 5131.47,-837.94 5228.94,-740.47 5228.94,-699.35 5375.79,-552.5 5778.7,-552.5 5978.5,-352.7 5978.5,179 6006.5,207 v2@6006.5,249
  Bottom Layer w6: CN8_SFP1.3@5608.48,829.48 5685.98,829.48 5719.5,863 5793.5,863 v2@5795.5,861 ; v2(5798.5,861) 5819.5,861 5829.5,871 5925.48,871 5996.3,800.17 5996.3,351.2 6007.5,340 v2(6007.5,250)
  Bottom Layer w12: CN1.20@4414.23,-1238.58 v2@4414.23,-1154.73
UP1_TX_FAULT: CN1.18 CN8_SFP1.2 RP5_SFP1.8 | length 3819.3
  Top Layer w6: RP5_SFP1.8@5734.19,882.53 v2@5774.03,882.53
  MidLayer1 w6: v2(4383.5,-1175) 4383.5,-1191 4439.5,-1247 4700.7,-1247 4755.58,-1192.11 4755.58,-1165.11 4767.5,-1153.2 4767.5,-1107.4 4778.56,-1096.34 4780.3,-1094.6 5024.96,-849.94 5136.44,-849.94 5240.94,-745.44 5240.94,-704.32 5380.76,-564.5 5783.68,-564.5 5990.5,-357.68 5990.5,169 6030.5,209 v2(6030.5,273)
  Bottom Layer w6: CN8_SFP1.2@5606.92,860.98 5695.48,860.98 5717.5,883 v2(5774.5,883) 5935.47,883 6013.58,804.89 6013.58,358.92 6030.5,342 v2(6030.5,273)
  Bottom Layer w12: CN1.18@4382.74,-1238.58 4382.74,-1175.76 v2(4383.5,-1175)
UP1_TX_N: C183.1 IC23_U1.39 R89.1 | length 870.4
  Top Layer w8: IC23_U1.39@3769.46,-138.02 3769.46,-101.16 v1(3766.3,-98) v1@3772.3,-98 ; v1(4207.5,365) 4208.37,364.13 C183.1@4224.87,364.13
  Bottom Layer w8: v1(3766.3,-98) v1@3766.3,-88.2 ; 3766.5,-88 v1@3766.3,-88.2 ; v1(4207.5,365) 4193.5,351 3921.5,351 3772.3,201.8 3772.3,-82.2 v1@3766.3,-88.2
UP1_TX_P: C182.1 IC23_U1.38 R87.1 | length 842.2
  Top Layer w8: IC23_U1.38@3789.15,-138.02 3789.15,-101.16 v1(3792.3,-98) ; v1@4207.5,321.2 v1(4207.5,321) 4208.35,320.15 C182.1@4224.87,320.15
  Bottom Layer w8: v1(3792.3,-98) v1@3792.3,-89.2 ; v1@3792.5,-89 v1@3792.3,-89.2 ; v1(4207.5,321) 4191.5,337 3927.3,337 3786.3,196 3786.3,-83.2 v1@3792.3,-89.2
VREFDAC: C93.2 C94.2 IC15.2 IC17.6 IC18.2 | length 1000
  Top Layer w12: C93.2@1560.5,-252.06 1605.44,-297 1657.5,-297 ; C94.2@1583.5,-562.5 1627,-519 1654.5,-519 ; 1657.5,-505 1657.5,-489 ; IC17.6@1736.96,-433 1661.5,-433 1657.5,-429 ; IC18.2@1833.18,-233.8 1762.7,-233.8 1750.5,-246 1750.5,-280 1733.5,-297 1657.5,-297 ; IC15.2@1838.18,-614.8 1774.3,-614.8 1764.5,-605 1764.5,-554 1729.5,-519 1654.5,-519 ; 1654.5,-519 1657.5,-516 1657.5,-489 ; 1657.5,-489 1657.5,-429 ; 1657.5,-429 1657.5,-297
WD_IN: CN13.3 IC5.83 | length 1452.5
  Top Layer w6: v1(2859.5,118) 2862.86,121.36 IC5.83@2862.86,190.65 IC5.83@2862.86,191.65 ; IC5.83@2863.86,155.7 IC5.83@2863.86,191.65
  MidLayer1 w6: v1(3317.5,-160) 3317.5,-106 3291.5,-80 2926.5,-80 2875.5,-29 2875.5,78 2859.5,94 v1@2859.5,116 ; v1@2859.5,116 v1(2859.5,118) 2861.5,118 v1@2859.5,116
  Bottom Layer w6: v1(3317.5,-160) 3317.5,-348.78 3541.61,-572.89 3627.41,-572.89 3645.33,-590.82 CN13.3@3645.33,-629.13
WD_OUT: CN13.5 IC5.84 | length 1425.8
  Top Layer w6: IC5.84@2882.55,191.65 2882.55,144.95 2885.5,142 v1(2885.5,117)
  MidLayer1 w6: v1(2885.5,117) 2883.5,115 2887.5,111 2887.5,-23 2929.5,-65 3297.5,-65 3336.5,-104 v1(3336.5,-138)
  Bottom Layer w6: v1(3336.5,-138) 3337.5,-139 3337.5,-351.81 3546.58,-560.89 3646.9,-560.89 3676.83,-590.82 CN13.5@3676.83,-629.13
XIN0_N: C171.2 IC24.6 | length 366
  Top Layer w8: IC24.6@4455.37,539.53 4485.4,509.5 4491,509.5 4555.5,445 4555.5,342 ; C171.2@4501.22,285 4513.22,273 4537.5,273 4555.5,291 4555.5,342 ; 4555.5,336 4555.5,342
XIN0_P: C169.2 IC24.7 | length 399.1
  Top Layer w8: IC24.7@4469.29,551.21 IC24.7@4469.29,553.45 4499,523.74 4499,521.5 4569.5,451 4569.5,283 4543.5,257 4515.22,257 C169.2@4501.22,243
XIN1_N: C183.2 IC24.3 | length 425
  Top Layer w8: C183.2@4260.31,364.13 4272.44,352 4348.5,352 ; 4293.37,352 4348.5,352 ; IC24.3@4413.61,497.78 4445.39,466 4451.5,466 4472.5,445 4472.5,388 4436.5,352 4348.5,352
XIN1_P: C182.2 IC24.4 | length 414.2
  Top Layer w8: C182.2@4260.31,320.15 4278.16,338 4314.5,338 ; 4306.16,338 4314.5,338 ; IC24.4@4427.53,511.7 4459.4,479.83 4459.4,477.9 4486.5,450.8 4486.5,382.2 4442.3,338 4314.5,338
XIN2_N: C179.1 IC24.9 | length 925.3
  Top Layer w8: IC24.9@4497.13,581.29 4526.42,552 4532.5,552 4761.5,323 4761.5,169.7 4963.7,-32.5 5059.28,-32.5 C179.1@5072.78,-46
XIN2_P: C177.1 IC24.10 | length 916
  Top Layer w8: IC24.10@4511.05,595.21 4511.05,593.25 4534.9,569.4 ; 4532.4,571.9 4534.9,569.4 ; C177.1@5072.78,-5 5059.28,-18.5 4969.5,-18.5 4775.5,175.5 4775.5,328.8 4534.9,569.4
XIN3_N: C181.1 IC24.12 | length 255.9
  Top Layer w8: IC24.12@4538.88,623.05 4539.45,623.05 4561.5,601 ; 4557.37,605.13 4561.5,601 ; 4590.5,601 4594.5,601 ; C181.1@4775.78,601 4594.5,601 ; 4561.5,601 4594.5,601
XIN3_P: C180.1 IC24.13 | length 250.6
  Top Layer w8: IC24.13@4552.8,636.97 4574.77,615 4592.5,615 ; 4584.7,615 4592.5,615 ; C180.1@4775.78,641 4759.5,641 4733.5,615 4592.5,615
XIN4_N: IC24.36
XIN4_P: IC24.35
XIN5_N: IC24.39
XIN5_P: IC24.38
XIN6_N: IC24.42
XIN6_P: IC24.41
XIN7_N: IC24.45
XIN7_P: IC24.44
XOUT0_N: C172.1 IC24.20 | length 1064.4
  Top Layer w8: IC24.20@4552.8,765.03 4581.77,794 4831.3,794 4907.5,717.8 4907.5,260.8 4999.3,169 5058.78,169 C172.1@5072.78,183
XOUT0_P: C170.1 IC24.19 | length 1056.4
  Top Layer w8: IC24.19@4566.72,751.11 4595.61,780 4825.5,780 4893.5,712 4893.5,255 4993.5,155 5033.5,155 ; 5039.5,155 5033.5,155 ; C170.1@5072.78,141 5058.78,155 5033.5,155
XOUT1_N: C174.1 IC24.23 | length 554.7
  Top Layer w8: IC24.23@4511.05,806.79 4512.49,806.79 4575.7,870 5019.78,870 C174.1@5033.78,884
XOUT1_P: C173.1 IC24.22 | length 544.6
  Top Layer w8: IC24.22@4524.97,792.87 4548.5,816.4 4548.5,823 4581.5,856 5019.78,856 C173.1@5033.78,842
XOUT2_N: C176.2 IC24.61 | length 662.8
  Top Layer w8: IC24.61@4299.47,511.7 4277.14,489.36 4272.86,489.36 4106.5,323 4106.5,191.5 4155.5,142.5 4327.28,142.5 C176.2@4340.78,156
XOUT2_P: C175.2 IC24.60 | length 701.7
  Top Layer w8: 4242.1,478.4 4239.1,475.4 ; IC24.60@4285.55,525.62 4260.22,500.28 4260.22,496.52 4239.1,475.4 ; C175.2@4340.78,115 4327.28,128.5 4149.7,128.5 4092.5,185.7 4092.5,328.8 4239.1,475.4
XOUT3_N: C187.2 IC24.58 | length 626.1
  Top Layer w8: C187.2@3898.46,160.81 3898.46,178 3884.86,191.59 3884.86,305.93 3948.3,369.36 4069.6,369.36 4233.48,533.24 4237.5,533.24 IC24.58@4257.71,553.45
XOUT3_P: C186.2 IC24.57 | length 637.7
  Top Layer w8: C186.2@3857.27,160.81 3857.27,178 3870.86,191.59 3870.86,311.73 3942.5,383.36 4063.8,383.36 4223.5,543.06 4223.5,547.08 IC24.57@4243.79,567.37
XOUT4_N: IC24.26
XOUT4_P: IC24.25
XOUT5_N: IC24.55
XOUT5_P: IC24.54
XOUT6_N: IC24.29
XOUT6_P: IC24.28
XOUT7_N: C185.1 IC24.52 | length 114.3
  Top Layer w8: C185.1@4080.22,588 4082.22,590 4091.72,599.5 4136,599.5 4173.47,636.97 IC24.52@4174.2,636.97
XOUT7_P: C184.1 IC24.51 | length 99.9
  Top Layer w8: C184.1@4080.22,629 4093.22,616 4125.39,616 IC24.51@4160.28,650.89
XP_FB_N: C185.2 IC5.128 R55.1 | length 662
  Top Layer w8: IC5.128@3425.85,636.53 3468.97,636.53 3471.81,639.37 3564.63,639.37 R55.1@3589.5,614.5 3614.37,639.37 3831.13,639.37 3869.5,601 4031.78,601 C185.2@4044.78,588
XP_FB_P: C184.2 IC5.129 R55.2 | length 661.8
  Top Layer w8: IC5.129@3425.85,656.21 3468.29,656.21 3471.13,653.37 3565.37,653.37 R55.2@3589.5,677.5 3613.63,653.37 3836.93,653.37 3875.3,615 4030.78,615 C184.2@4044.78,629
pads on no net: CN1. CN3. CN3.4 CN3.6 CN8_SFP0. CN8_SFP1. CN9.1 CN9.4 CN9.6 CN9.9 CN10.2 CN10.3 CN10.3mate CN10.5 CN10.6 CN10.8 CN10.9 CN10.11 CN10.12 CN10.20 CN10.21 CN10.23 CN10.24 CN10.32 CN10.33 CN10.35 CN10.36 CN10.44 CN10.45 CN10.47 CN10.48 CN10.56 CN10.57 CN10.59 CN10.60 CN10.68 CN10.69 CN10.71 CN10.72 CN10.80 CN10.81 CN10.83 CN10.84 CN10.87 CN10.88 CN10.90 CN10.91 CN10.93 CN10.94 CN10.99 CN10.100 CN10.102 CN10.103 CN10.105 CN10.106 CN10.111 CN10.112 CN10.114 CN10.115 CN10.117 CN10.118 CN10.123 CN10.124 CN10.126 CN10.127 CN10.129 CN10.130 CN10.135 CN10.136 CN10.138 CN10.139 CN10.141 CN10.142 CN10.147 CN10.148 CN10.150 CN10.151 CN10.153 CN10.154 CN10.159 CN10.160 CN10.162 CN10.163 CN10.165 CN10.166 CN10.168 CN10.169 CN11.0 CN12.0 CN12.11 CN12.12 CN12.15 CN12.17 CN12.19 CN12.21 CN12.25 CN12.26 CN12.27 CN12.28 CN13. IC5.3 IC5.23 IC5.28 IC5.50 IC5.51 IC5.85 IC5.86 IC5.87 IC5.111 IC5.112 IC5.114 IC6.8 IC6.23 IC6.24 IC7.2 IC7.8 IC7.15 IC7.18 IC7.19 IC7.20 IC7.25 IC7.26 IC7.39 IC7.40 IC7.42 IC7.43 IC7.52 IC7.53 IC7.55 IC7.56 IC8.8 IC8.9 IC8.10 IC8.11 IC8.12 IC8.13 IC9.5 IC12.5 IC12.6 IC12.8 IC13.1 IC14.1 IC14.4 IC14.6 IC17.1 IC17.3 IC17.5 IC17.7 IC19.2 IC19.3 IC19.5 IC20.1 IC20.6 IC20.7 IC20.28 IC20.29 IC20.30 IC20.31 IC23_U0.18 IC23_U1.18 IC39.5 IC42.5 RP3_U0.1 RP3_U0.2 RP3_U0.7 RP3_U0.8 RP3_U1.1 RP3_U1.2 RP3_U1.7 RP3_U1.8 RP5_SFP0.3 RP5_SFP0.4 RP5_SFP0.5 RP5_SFP0.6 RP5_SFP1.3 RP5_SFP1.4 RP5_SFP1.5 RP5_SFP1.6 RP7.3 RP7.4 RP7.5 RP7.6

## Polygon pours and split planes (outlines as drawn)
GND on Top Layer "poly_external" (solid, pour order 1000): 5645.5,-970 5645.5,-1143 5923.5,-1143 5926.5,-1146 5926.5,-998 5927.5,-997 5893.5,-963 5824.5,-963 5824.5,-1055 5751.5,-1055 5744.5,-1048 5725.5,-1029 5725.5,-789 5668.5,-732 5645.5,-732
NetC127_1 on Top Layer "MidLayer4-No Net" (solid, pour order 1000): 2363.5,-700 2184.5,-700 2160.5,-724 2160.5,-909 2178.5,-927 2186.5,-935 2421.5,-935 2476.5,-880 2498.5,-880 2511.5,-867 2511.5,-841 2504.5,-841 2363.5,-700
GND on Top Layer "poly_external" (solid, pour order 1001): 5702.5,-1170 5672.5,-1200 5621.5,-1200 5515.5,-1094 5382.5,-1094 5382.5,-880 5492.5,-880 5532.5,-920 5532.5,-1030 5562.5,-1060 5632.5,-1060 5642.5,-1050 5702.5,-1050
+3V3_OSC on MidLayer2 "poly_internal" (solid, pour order 1002): 1506.5,-730 1506.5,-692 1524.5,-674 1529.5,-669 1681.5,-669 1681.5,-193 1693.5,-181 1724.5,-150 1890.5,-150 2043.5,3 2233.5,3 2370.5,3 2379.5,-6 2379.5,-529 2413.5,-563 2419.5,-569 2658.5,-569 2950.5,-569 3013.5,-632 3026.5,-645 3026.5,-781 2846.5,-961 2496.5,-961 2472.5,-961 2444.5,-933 2443.5,-934 2296.5,-934 2041.5,-1189 1506.5,-1189
+3V3 on InternalPlane1 (split plane): 6454.58,1230.53 6454.97,1226.61 6456.11,1222.84 6457.97,1219.36 6460.47,1216.32 6463.52,1213.82 6466.99,1211.96 6470.76,1210.82 6474.68,1210.43 6987.48,1210.43 6987.48,-309.31 6987.86,-313.23 6989,-317 6990.86,-320.47 6993.36,-323.52 6996.41,-326.02 6999.88,-327.88 7003.65,-329.02 7007.57,-329.41 7062.85,-329.41 7062.85,-1133.66 6474.68,-1133.66 6470.76,-1134.04 6466.99,-1135.19 6463.52,-1137.05 6460.47,-1139.54 6457.97,-1142.59 6456.11,-1146.06 6454.97,-1149.83 6454.58,-1153.76 6454.58,-1426.97 1787.66,-1426.97 1787.66,-1418.62 1790.86,-1415.81 1793.68,-1412.59 1796.05,-1409.04 1797.94,-1405.21 1799.32,-1401.17 1800.15,-1396.98 1800.38,-1393.53 1800.46,-1392.72 1800.38,-1391.9 1800.15,-1388.45 1799.32,-1384.27 1797.94,-1380.22 1796.05,-1376.39 1793.68,-1372.84 1790.86,-1369.63 1787.65,-1366.81 1784.1,-1364.44 1780.27,-1362.55 1776.23,-1361.18 1772.04,-1360.34 1768.59,-1360.12 1767.79,-1360.04 1767.78,-1360.04 521.91,-1360.04 521.91,-1318.9 521.9,-1318.81 521.54,-1312.26 520.42,-1305.71 518.58,-1299.33 516.04,-1293.19 512.83,-1287.37 508.98,-1281.95 504.55,-1277 499.6,-1272.57 494.18,-1268.73 488.37,-1265.51 482.23,-1262.97 475.84,-1261.13 469.29,-1260.02 462.74,-1259.65 462.66,-1259.64 136.9,-1259.64 136.9,1259.64 458.06,1259.64 462.03,1258 462.03,1259.64 462.09,1259.63 462.64,1259.69 468.42,1260.01 475.08,1261.14 481.57,1263.01 487.81,1265.6 493.73,1268.87 499.24,1272.78 504.28,1277.28 508.78,1282.32 512.69,1287.83 515.96,1293.74 518.54,1299.98 520.41,1306.48 521.54,1313.14 521.81,1317.83 521.91,1318.9 521.91,1426.97 6454.58,1426.97
+2V5 on InternalPlane1 (split plane): 192 vertices, not listed, extent 1055.3,-1189.9 4613.4,982.9
+1V2 on InternalPlane1 (split plane): 3520.4,1006.89 3520.4,955 3520.4,953 3520.4,951.11 3496.39,927.1 3123.61,927.1 3059.1,991.6 3057.45,992.71 3055.5,993.1 2893.5,993.1 2891.55,992.71 2889.9,991.6 2788.39,890.1 2725.61,890.1 2694.1,921.6 2692.45,922.71 2690.5,923.1 2638.5,923.1 2636.55,922.71 2634.9,921.6 2625.9,912.6 2624.79,910.95 2624.4,909 2624.4,854 2624.79,852.05 2625.9,850.4 2672.4,803.89 2672.4,782.11 2671.39,781.1 2641.5,781.1 2639.55,780.71 2637.9,779.6 2631.9,773.6 2630.79,771.95 2630.4,770 2630.4,737 2630.79,735.05 2631.9,733.4 2633.55,732.29 2635.5,731.9 2851.5,731.9 2853.45,732.29 2855.1,733.4 2856.21,735.05 2856.6,737 2856.6,757.89 2867.61,768.9 3314.5,768.9 3316.45,769.29 3318.1,770.4 3319.21,772.05 3319.32,772.61 3338.61,791.9 3388.39,791.9 3400.4,779.89 3400.4,758.11 3330.9,688.6 3329.79,686.95 3329.4,685 3329.4,674 3329.4,661 3329.4,472 3329.79,470.05 3330.9,468.4 3394.4,404.89 3394.4,367.11 3377.39,350.1 3335.61,350.1 3271.1,414.6 3269.45,415.71 3267.5,416.1 3041.5,416.1 3039.55,415.71 3037.9,414.6 3009.9,386.6 3008.79,384.95 3008.4,383 3008.4,334 3008.79,332.05 3009.9,330.4 3067.9,272.4 3069.55,271.29 3071.5,270.9 3254.39,270.9 3264.4,260.89 3264.4,147.1 2987.5,147.1 2987.4,147.08 2987.3,147.1 2978.71,147.1 2962.2,163.6 2960.55,164.71 2958.6,165.1 2958.55,165.09 2958.5,165.1 2883.6,165.1 2883.6,266 2883.21,267.95 2882.1,269.6 2857.1,294.6 2855.45,295.71 2853.5,296.1 2809.5,296.1 2807.55,295.71 2805.9,294.6 2792.9,281.6 2791.79,279.95 2791.4,278 2791.4,235 2728.6,235 2728.6,399 2728.21,400.95 2727.1,402.6 2658.32,471.39 2658.21,471.95 2657.1,473.6 2631.6,499.11 2631.6,515.89 2669.1,553.4 2679.1,563.4 2680.21,565.05 2680.6,567 2680.6,642 2680.21,643.95 2679.1,645.6 2668.1,656.6 2666.45,657.71 2664.5,658.1 2570.61,658.1 2495.6,733.11 2495.6,891 2495.21,892.95 2494.1,894.6 2492.45,895.71 2490.5,896.1 1878.61,896.1 1869.6,905.11 1869.6,1065.9 2619.5,1065.9 2620,1066 2620.5,1065.9 2623.5,1065.9 2625.45,1066.29 2627.1,1067.4 2674.61,1114.9 3412.39,1114.9
GND on GND (split plane): 167 vertices, not listed, extent 129.5,-1426.97 7062.85,1426.97

## Other copper
InternalPlane1 (plane layer: these items are gaps in the copper):
  rectangle: -18.4,-1267.8 136.9,1282.8
  lines w10: 2619.5,1071 2306.5,1071 1864.5,1071 1864.5,903 1876.5,891 2490.5,891 2490.5,731 2568.5,653 2664.5,653 2675.5,642 2675.5,567 2665.5,557 2626.5,518 2626.5,497 2653.5,470 ; 2620.5,1071 2623.5,1071 2672.5,1120 3412.5,1120 ; 2642.5,480 2723.5,399 2723.5,229.9 2796.5,229.9 2796.5,278 2809.5,291 2853.5,291 2878.5,266 2878.5,161 ; 2683.1,191 2876.5,191 2877.8,192.3 ; 2684.8,191 1837.6,191 1558.6,470 1050.2,470 1050.2,-47.2 1099.1,-96.1 1467.6,-96.1 1549.5,-14.2 2861.5,-14.2 2980.8,-133.5 ; 2785.5,885 2790.5,885 2893.5,988 3027.5,988 3055.5,988 3121.5,922 3498.5,922 3525.5,949 3525.5,955 ; 2789.5,885 2723.5,885 2690.5,918 2638.5,918 2629.5,909 2629.5,854 2677.5,806 2677.5,780 2673.5,776 2641.5,776 2635.5,770 2635.5,737 2851.5,737 2851.5,760 2865.5,774 3314.5,774 ; 2878.5,160 2958.5,160 ; 2958.6,160 2976.6,142 2987.3,142 ; 2981.5,-134 3045.5,-198 3045.5,-910 4233.5,-910 4239.5,-916 ; 3308.5,775 3314.5,775 3336.5,797 3390.5,797 3405.5,782 3405.5,756 3334.5,685 3334.5,661 ; 3332.5,345 3379.5,345 3399.5,365 3399.5,407 3334.5,472 3334.5,674 ; 3333.5,345 3267.5,411 3041.5,411 3013.5,383 3013.5,334 3071.5,276 3256.5,276 3269.5,263 3269.5,142 ; 3414.5,1120 3525.5,1009 3525.5,953 ; 3526.5,983 3564.5,983 ; 3559.5,983 3719.5,983 ; 3720.5,983 3764.5,939 3764.5,708 3729.5,673 3729.5,-138 3742.5,-151 3920.5,-151 3920.5,-72 3930.5,-62 4023.5,-62 4046.5,-85 4046.5,-182 4080.5,-216 4177.5,-216 4267.5,-126 4449.5,-126 4542.5,-33 4586.5,-33 4618.5,-65 4618.5,-139 4545.5,-212 4545.5,-511 4333.5,-723 ; 4240.5,-1195 4331.5,-1195 4332.5,-1196 ; 4240.5,-1194 4240.5,-918 ; 4333.5,-1195 4333.5,-724 ; 3269.5,142 2987.5,142 3269.5,142
GND (plane layer: these items are gaps in the copper):
  rectangle: -21.6,-1282.4 129.5,1275.5
  lines w10: 5238.6,-875 5238.6,-630.8 5261.7,-607.7 5692,-607.7 5964.8,-880.5 5964.8,-1168.2 5917.3,-1215.7 5630.2,-1215.7 5538.2,-1123.7 5406.5,-1123.7 5259.5,-1270.7 5259.5,-1443.1 ; 5239.2,-876.1 5486.6,-876.1 5530.9,-920.4

## Silkscreen, mask and mechanical layers (free items; w line width, h text height)
Top Overlay:
  drawing of 532 lines, arcs and shapes, not listed
  text "WhiteRabbit" at 3940.27,-856.41 h170
  text "Switch CLKB" at 3940.27,-966.14 h170
  text "T. W. 2009" at 4027.52,-1077.2 h150
  text "rev 1.1" at 4315.8,-1248.4 h150
Mechanical 1:
  lines w0.39: -27.5,-1259.92 -27.5,1259.85 ; -27.49,-1259.74 ccw(c-7.73,-1259.78) -7.76,-1279.54 ; -27.51,1259.79 cw(c-7.74,1259.76) -7.71,1279.52 ; -8.41,-1279.53 462.66,-1279.53 cw(c462.66,-1318.9) 502.03,-1318.9 502.03,-1360.24 ccw(c521.71,-1360.24) 521.71,-1379.92 1767.78,-1379.92 cw(c1767.78,-1392.72) 1767.78,-1405.51 1767.78,-1427.17 ccw(c1787.46,-1427.17) 1787.46,-1446.85 6192.97,-1446.85 6474.47,-1446.85 6474.47,-1153.54 6622.11,-1153.54 ; -7.8,1279.53 462.03,1279.53 ; 460.69,1279.53 ccw(c461.67,1319.88) 502.03,1318.9 502.03,1427.17 cw(c521.71,1427.17) 521.71,1446.85 6474.47,1446.85 6474.47,1230.31 7007.35,1230.31 ; 6584.7,-1153.54 7082.74,-1153.54 7082.74,-309.51 ; 7007.36,1230.2 7007.36,-309.52 7082.54,-309.52
Mechanical 2:
  circle w10: c6072.5,-1250 r70.71
  circle w10: c922.5,1350 r70.71
  lines w10: 922.5,1070 922.5,1280 ; 922.5,1073.5 922.5,1020.2 972.9,969.8 ; 972.5,970 1852.5,970 ; 6072.5,-1180 6072.5,-1140 5932.5,-1140 6792.5,-1140
  text "950, 1350 mil" at 1168.5,996 h50
  text "Fiducial drawing" at 3242.5,-30 h60
  text "6100, -1250 mil" at 5990.5,-1115 h50
Mechanical 15:
  text "Edge connector markings" at 364.23,-1263.78 h50